# Altium PCB PCI long card 5V - 64 BIT.PCBDOC
Units mil, origin at the board's own origin, x right, y up, seen from the top; angles counter-clockwise.
Board outline 12283 x 4200 mil, 10 copper layers (TopLayer, MidLayer1, MidLayer2, MidLayer3, MidLayer4, MidLayer5, MidLayer6, MidLayer7, MidLayer8, BottomLayer); 1 components, 0 nets, 188 pads, 0 vias.
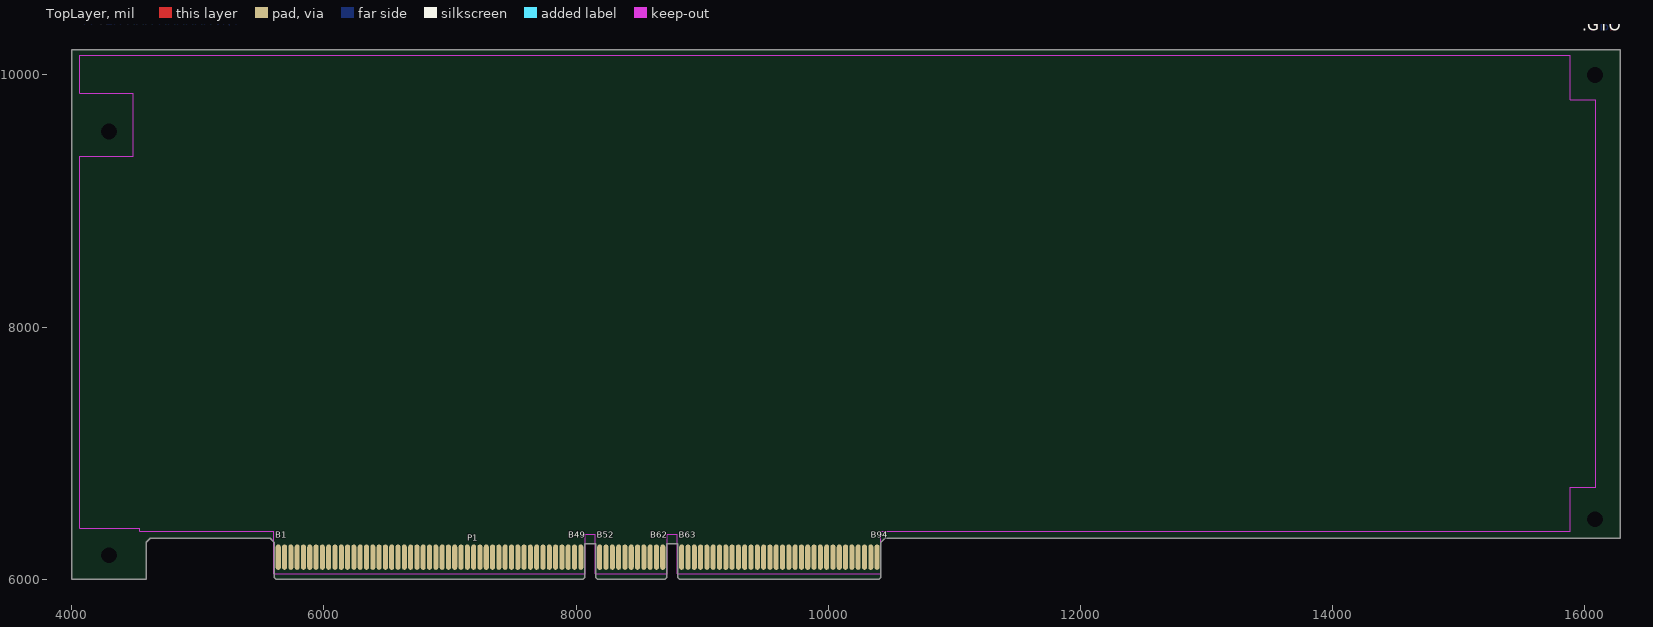
[diagram p0: TopLayer view]
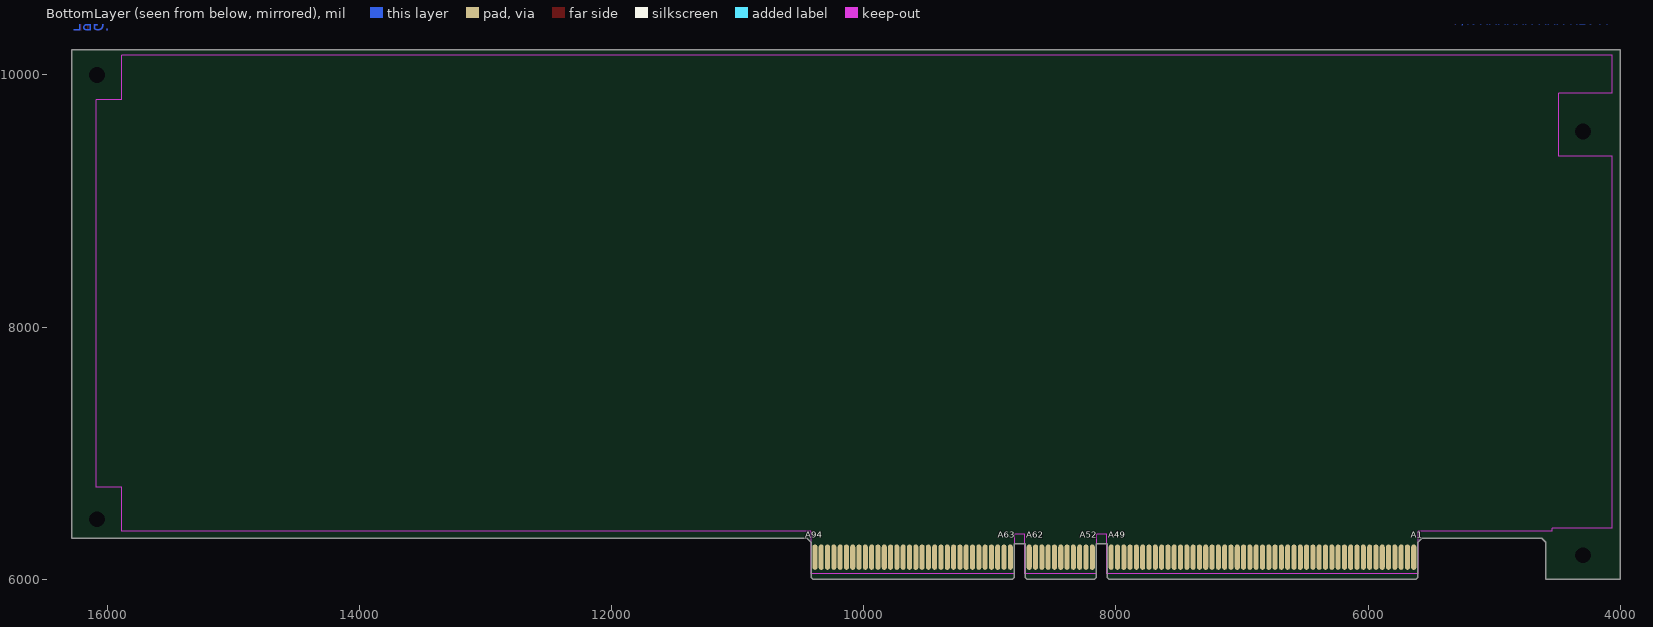
[diagram p1: BottomLayer view, seen from below]
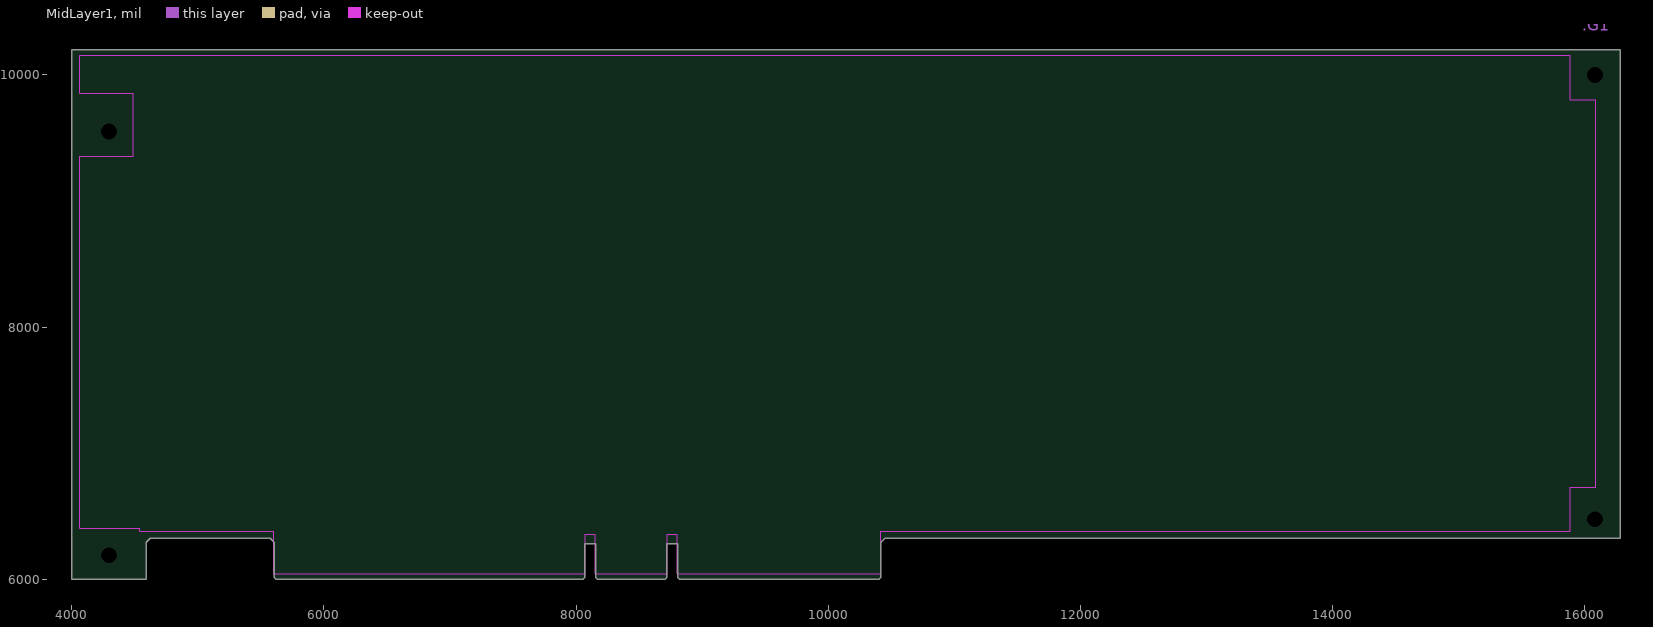
[diagram p2: MidLayer1]
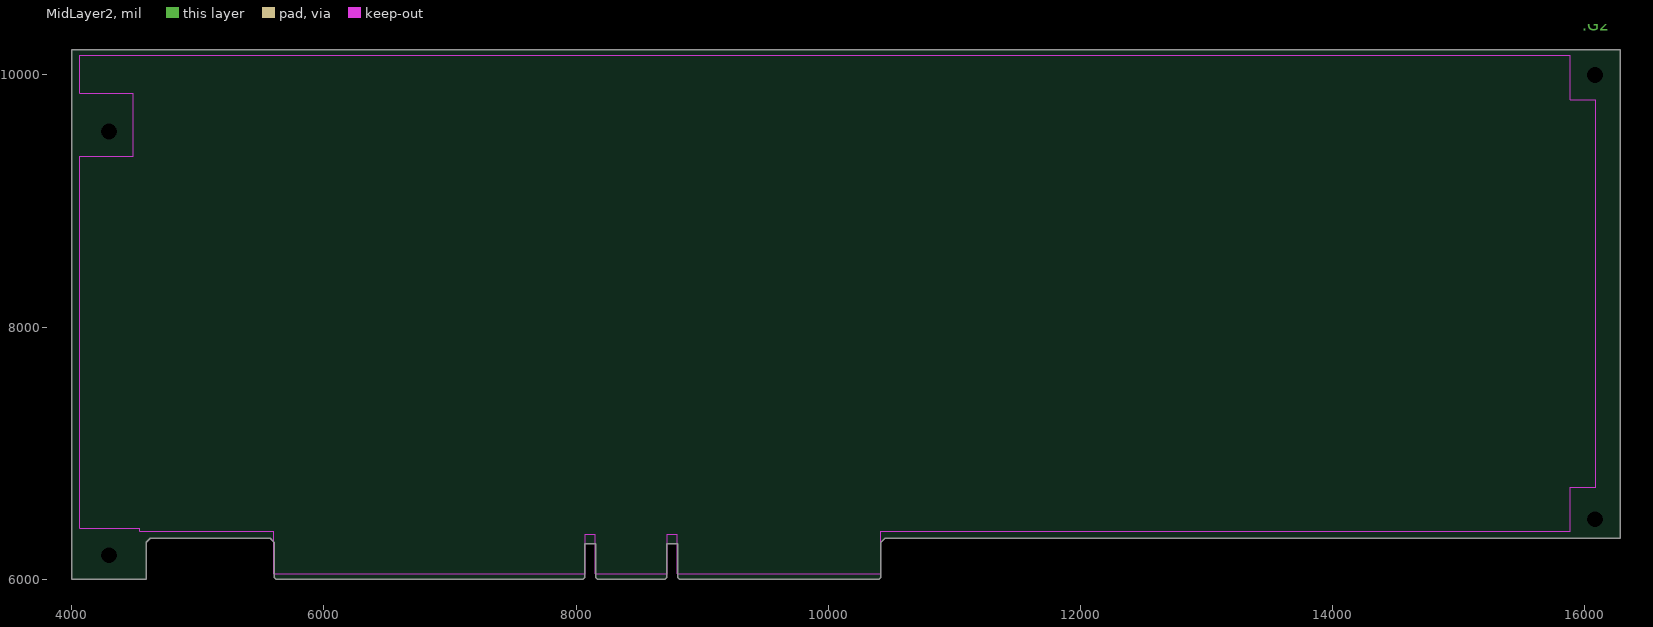
[diagram p3: MidLayer2]
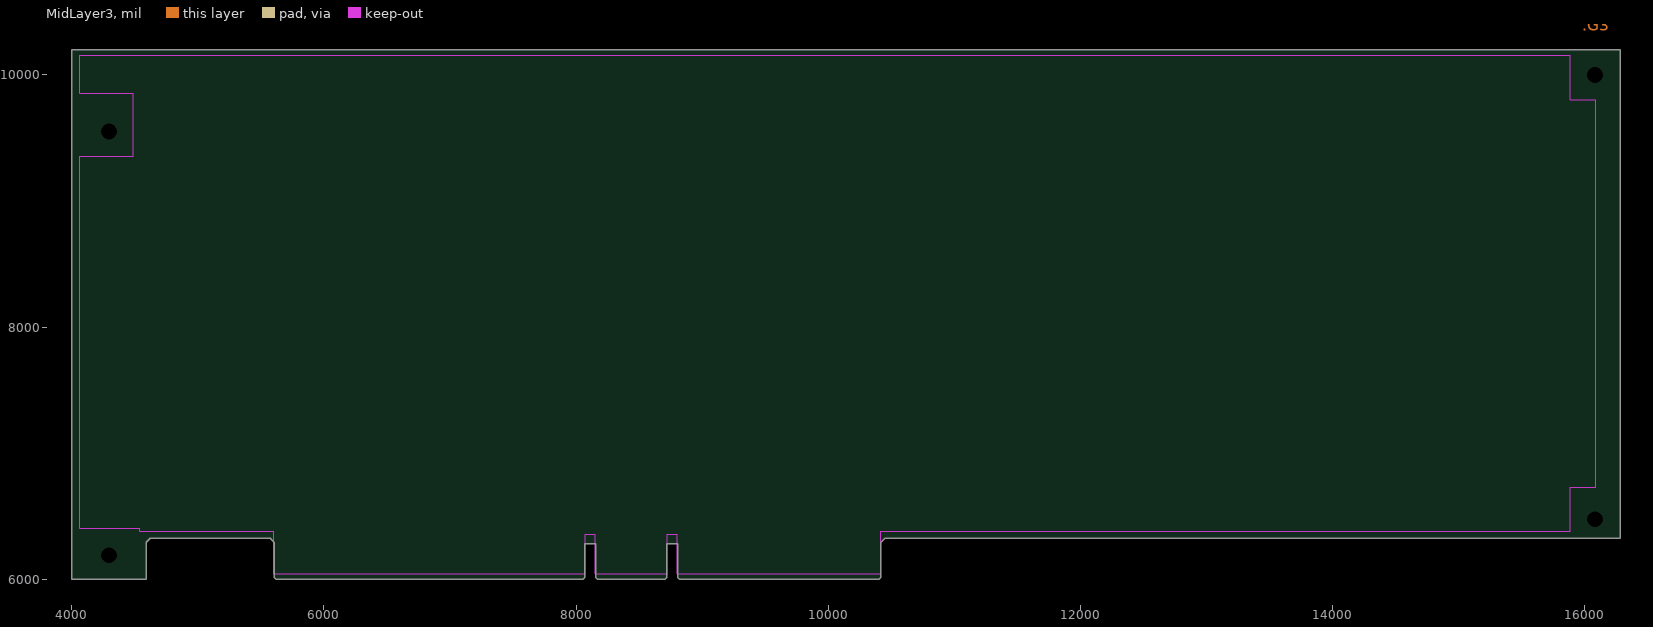
[diagram p4: MidLayer3]
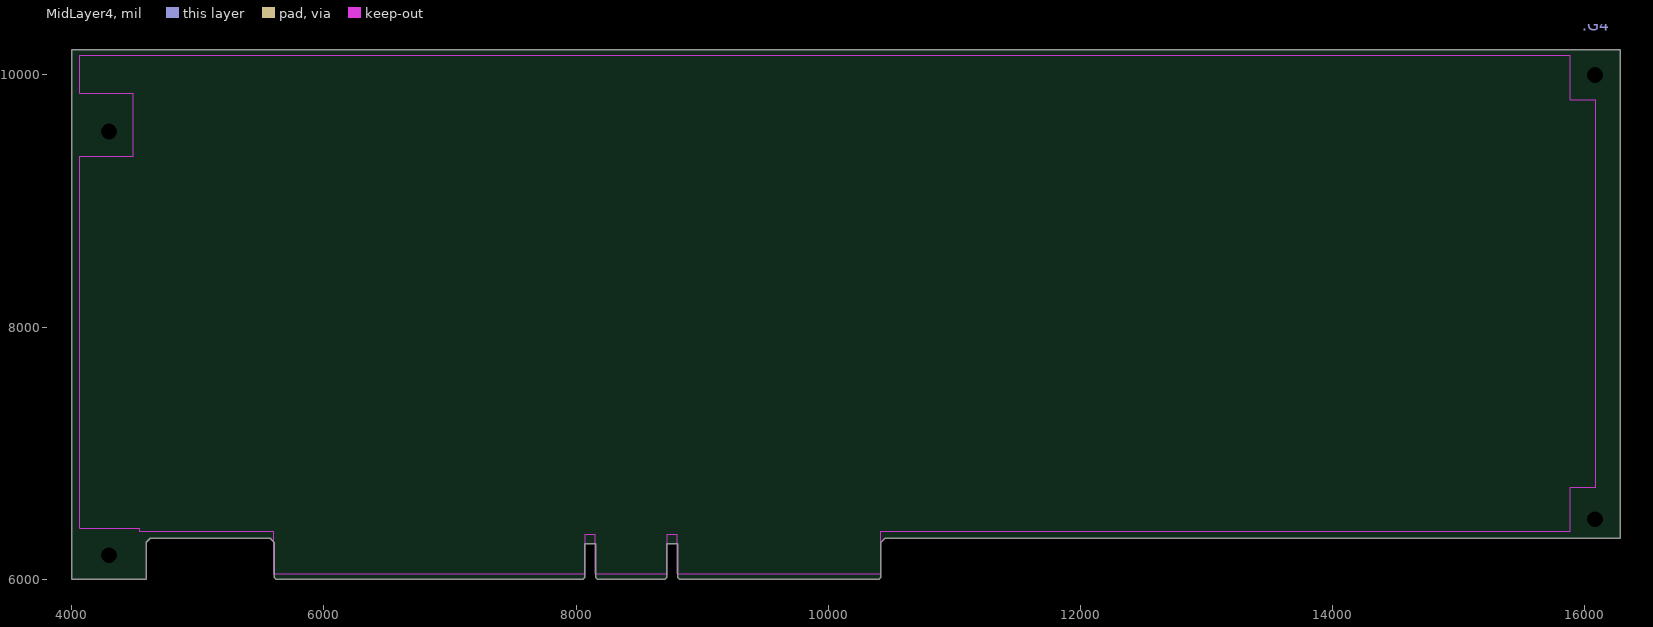
[diagram p5: MidLayer4]
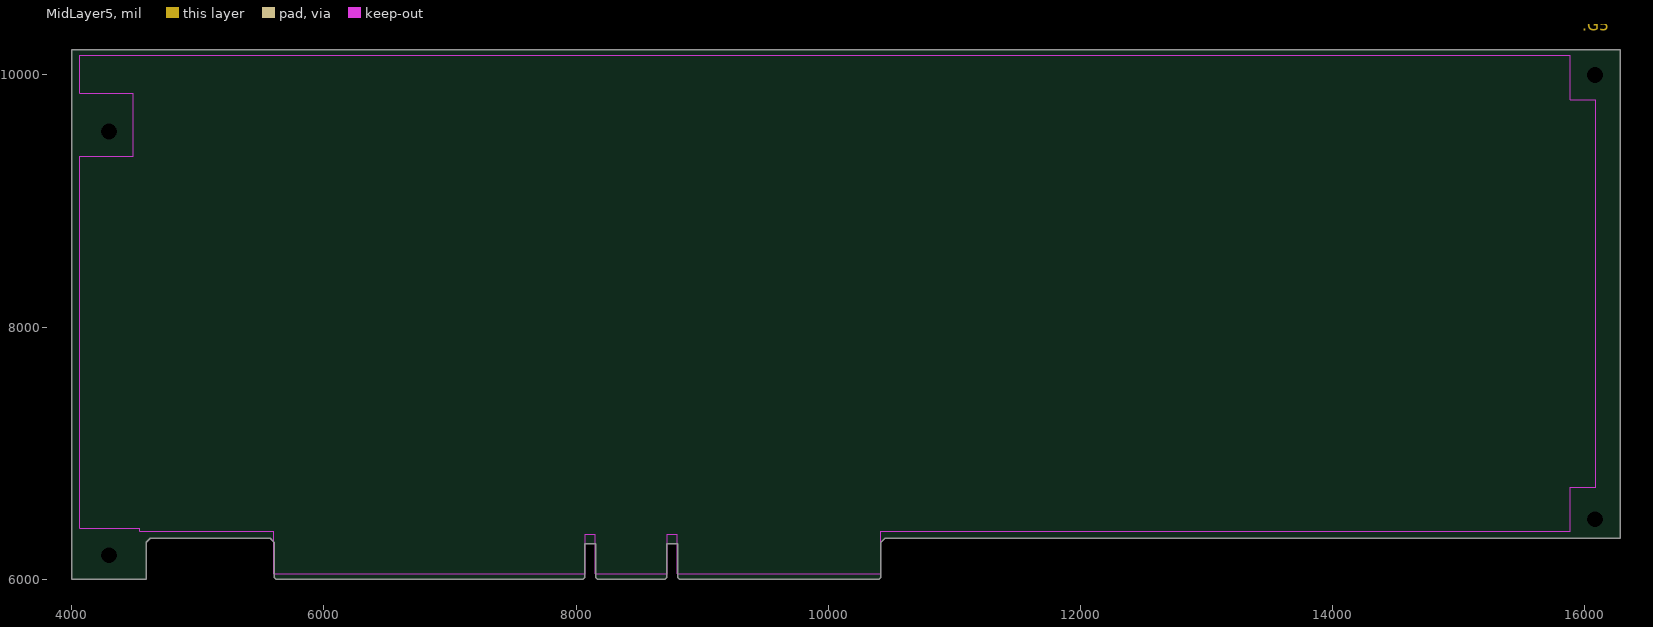
[diagram p6: MidLayer5]
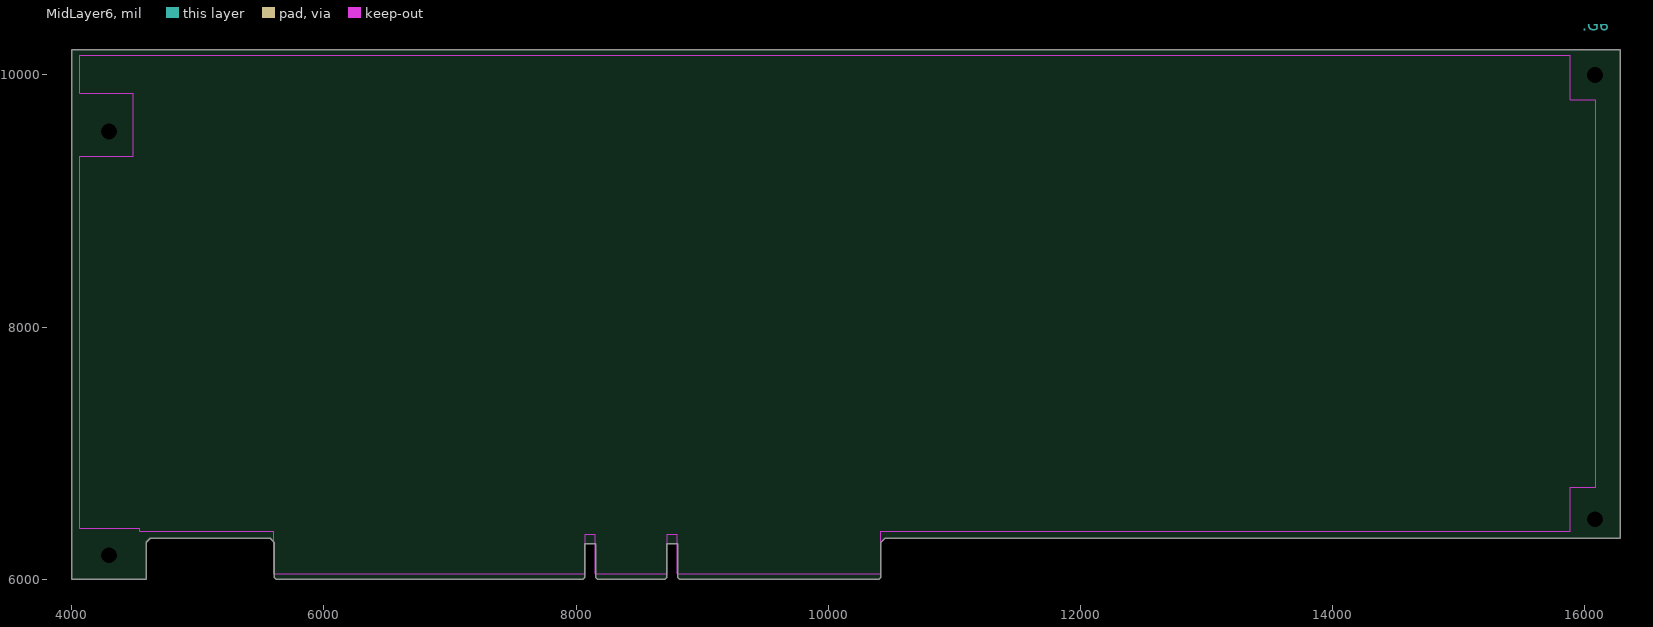
[diagram p7: MidLayer6]
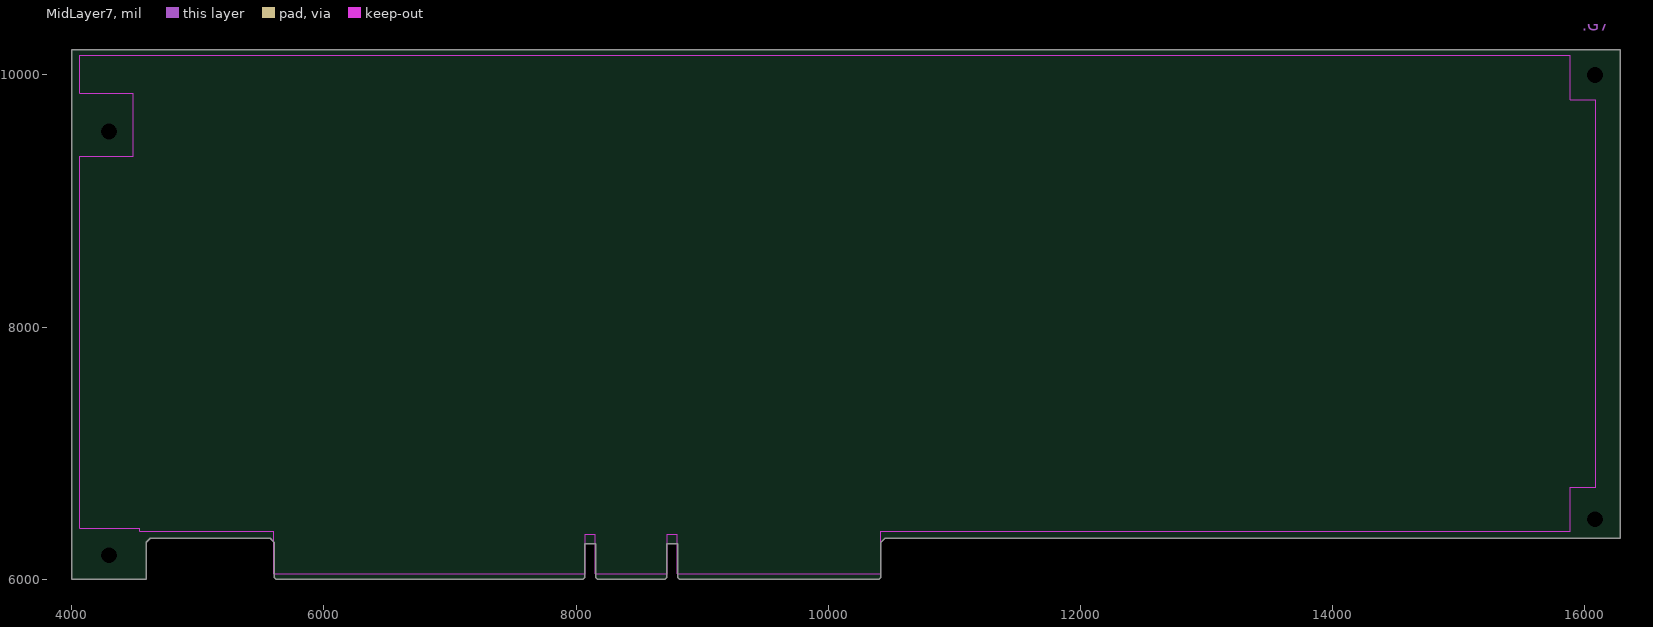
[diagram p8: MidLayer7]
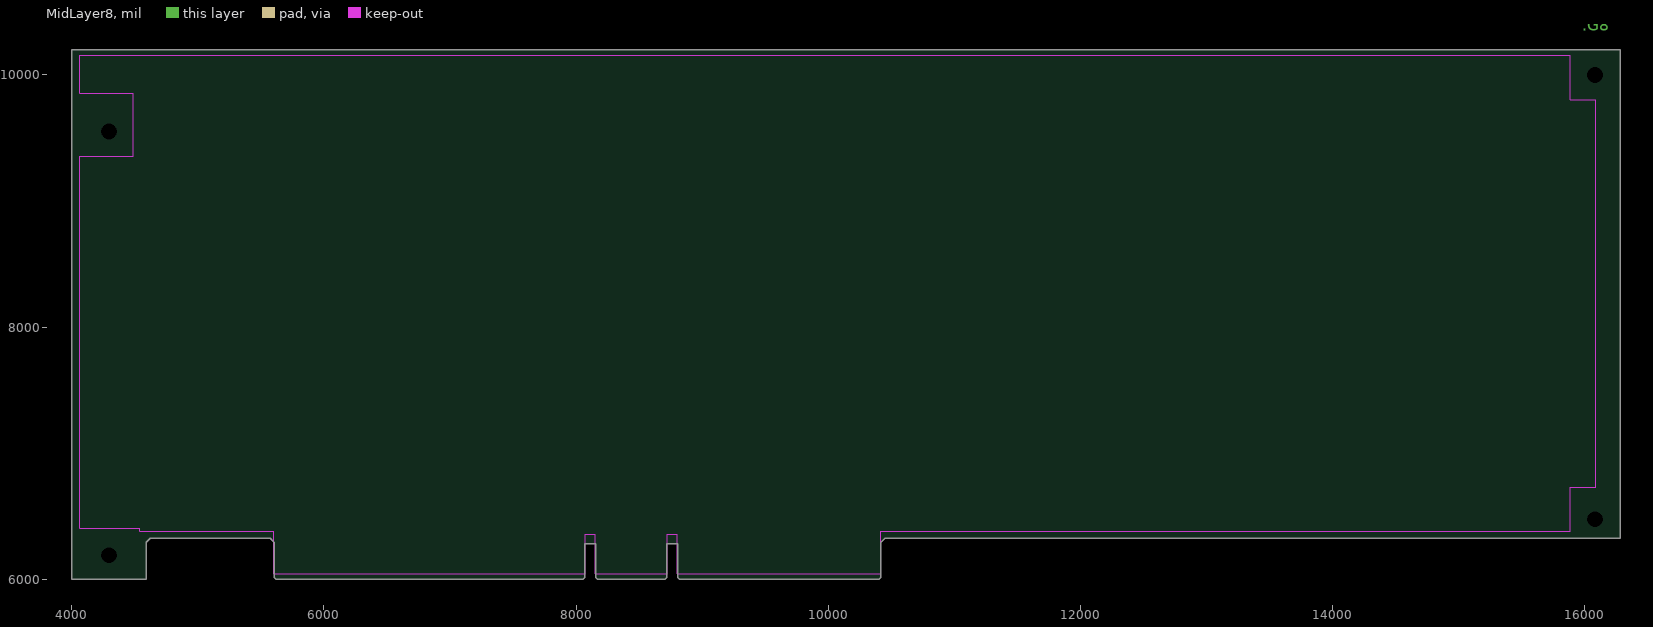
[diagram p9: MidLayer8]

## Layer stack, top to bottom
TopSolder: solder mask 0.4, Solder Resist, Dk 3.5
TopLayer: signal copper 1.4
Dielectric1: core 12.6, FR-4, Dk 4.8
MidLayer1: signal copper 1.4
Dielectric2: prepreg 12.6, FR-4, Dk 4.8
MidLayer2: signal copper 1.4
Dielectric3: core 12.6, FR-4, Dk 4.8
MidLayer3: signal copper 1.4
Dielectric4: prepreg 12.6, FR-4, Dk 4.8
MidLayer4: signal copper 1.4
Dielectric5: core 12.6, FR-4, Dk 4.8
MidLayer5: signal copper 1.4
Dielectric6: prepreg 12.6, FR-4, Dk 4.8
MidLayer6: signal copper 1.4
Dielectric7: core 12.6, FR-4, Dk 4.8
MidLayer7: signal copper 1.4
Dielectric8: prepreg 12.6, FR-4, Dk 4.8
MidLayer8: signal copper 1.4
Dielectric9: core 12.6, FR-4, Dk 4.8
BottomLayer: signal copper 1.4
BottomSolder: solder mask 0.4, Solder Resist, Dk 3.5

## Board outline
4000,6000 4591,6000 4591,6294 4622,6325 5574,6325 5605,6294 5605,6015 5620,6000 8056,6000 8071,6015 8071,6283 8155,6283 8155,6015 8170,6000 8706,6000 8721,6015 8721,6283 8805,6283 8805,6015 8820,6000 10404,6000 10419,6015 10419,6294 10450,6325 16283,6325 16283,10200 4000,10200

## Design rules (kind name [scope] priority, off if disabled: settings)
Clearance [All] p1: gap=10
FabricationTestPointUsage TestPointUsage [All] p1: valid=0 allowmultiple=FALSE
FabricationTestpoint Testpoint [All] p1: side=3 testpointundercomponent=TRUE minsize=40 maxsize=100 preferedsize=60 minholesize=20 maxholesize=40 preferedholesize=32 testpointgrid=1 allowsidetop=TRUE allowsidebottom=TRUE usegrid=TRUE gridtolerance=0.01
PasteMaskExpansion PasteMaskExpansion_1 [InComponent('P1')] p1: expansion=-100
PasteMaskExpansion [All] p2: expansion=0
PlaneClearance [All] p1: clearance=10
PolygonConnect [All] p1: connectstyle=Relief reliefconductorwidth=10 reliefentries=4 polygonreliefangle="90 Angle" airgapwidth=10
RoutingVias [All] p1: holewidth=28 width=50 viastyle="Through Hole" minholewidth=28 minwidth=50 maxholewidth=28 maxwidth=50
SilkToSolderMaskClearance SilkscreenOverComponentPads [IsPad] p1: minsilkscreentomaskgap=10 clearancetoexposedcopper=TRUE
SolderMaskExpansion [All] p1: expansion=2
Width [All] p1: maxlimit=10 minlimit=10 preferedwidth=10
25 further rules are at their usual default settings.

## Components (designator, comment, footprint, x,y, rotation, side; value= is the part's Value field where it differs from the comment)
P1 "PCI5V64BIT" PCI5V64BIT 5638,6175 r0 top locked

## Footprints (in the part's own frame and the unit in brackets; to place one, negate y for a bottom-side part, rotate by r counter-clockwise, add the part's x,y. Pads: shape width x height; smd on the part's side, far side on the other; paste and mask are expansions set on the pad)
PCI5V64BIT [mil]
  oval 40x200 smd far side: A1(0,0) A2(50,0) A3(100,0) A4(150,0) A5(200,0) A6(250,0) A7(300,0) A8(350,0) A9(400,0) A10(450,0) A11(500,0) A12(550,0) A13(600,0) A14(650,0) A15(700,0) A16(750,0) A17(800,0) A18(850,0) A19(900,0) A20(950,0) A21(1000,0) A22(1050,0) A23(1100,0) A24(1150,0) A25(1200,0) A26(1250,0) A27(1300,0) A28(1350,0) A29(1400,0) A30(1450,0) A31(1500,0) A32(1550,0) A33(1600,0) A34(1650,0) A35(1700,0) A36(1750,0) A37(1800,0) A38(1850,0) A39(1900,0) A40(1950,0) A41(2000,0) A42(2050,0) A43(2100,0) A44(2150,0) A45(2200,0) A46(2250,0) A47(2300,0) A48(2350,0) A49(2400,0) A52(2550,0) A53(2600,0) A54(2650,0) A55(2700,0) A56(2750,0) A57(2800,0) A58(2850,0) A59(2900,0) A60(2950,0) A61(3000,0) A62(3050,0) A63(3200,0) A64(3250,0) A65(3300,0) A66(3350,0) A67(3400,0) A68(3450,0) A69(3500,0) A70(3550,0) A71(3600,0) A72(3650,0) A73(3700,0) A74(3750,0) A75(3800,0) A76(3850,0) A77(3900,0) A78(3950,0) A79(4000,0) A80(4050,0) A81(4100,0) A82(4150,0) A83(4200,0) A84(4250,0) A85(4300,0) A86(4350,0) A87(4400,0) A88(4450,0) A89(4500,0) A90(4550,0) A91(4600,0) A92(4650,0) A93(4700,0) A94(4750,0)
  oval 40x200 smd: B1(0,0) B2(50,0) B3(100,0) B4(150,0) B5(200,0) B6(250,0) B7(300,0) B8(350,0) B9(400,0) B10(450,0) B11(500,0) B12(550,0) B13(600,0) B14(650,0) B15(700,0) B16(750,0) B17(800,0) B18(850,0) B19(900,0) B20(950,0) B21(1000,0) B22(1050,0) B23(1100,0) B24(1150,0) B25(1200,0) B26(1250,0) B27(1300,0) B28(1350,0) B29(1400,0) B30(1450,0) B31(1500,0) B32(1550,0) B33(1600,0) B34(1650,0) B35(1700,0) B36(1750,0) B37(1800,0) B38(1850,0) B39(1900,0) B40(1950,0) B41(2000,0) B42(2050,0) B43(2100,0) B44(2150,0) B45(2200,0) B46(2250,0) B47(2300,0) B48(2350,0) B49(2400,0) B52(2550,0) B53(2600,0) B54(2650,0) B55(2700,0) B56(2750,0) B57(2800,0) B58(2850,0) B59(2900,0) B60(2950,0) B61(3000,0) B62(3050,0) B63(3200,0) B64(3250,0) B65(3300,0) B66(3350,0) B67(3400,0) B68(3450,0) B69(3500,0) B70(3550,0) B71(3600,0) B72(3650,0) B73(3700,0) B74(3750,0) B75(3800,0) B76(3850,0) B77(3900,0) B78(3950,0) B79(4000,0) B80(4050,0) B81(4100,0) B82(4150,0) B83(4200,0) B84(4250,0) B85(4300,0) B86(4350,0) B87(4400,0) B88(4450,0) B89(4500,0) B90(4550,0) B91(4600,0) B92(4650,0) B93(4700,0) B94(4750,0)

## Free pads (board coordinates)
  round 50 hole 125: 1(16083,6475) 2(16083,10000) 3(4295,9552) 4(4295,6190)

## Nets (pads, with @x,y where several pads share a name; then routed paths per layer and width w, separated by ;. In a path a pad name is that pad's centre, name@x,y a point inside that pad or via, vN(x,y) a via of type N, cw(c..) or ccw(c..) an arc to the next point about the centre after c; other vN are vias at no path point)
pads on no net: P1.A1 P1.A2 P1.A3 P1.A4 P1.A5 P1.A6 P1.A7 P1.A8 P1.A9 P1.A10 P1.A11 P1.A12 P1.A13 P1.A14 P1.A15 P1.A16 P1.A17 P1.A18 P1.A19 P1.A20 P1.A21 P1.A22 P1.A23 P1.A24 P1.A25 P1.A26 P1.A27 P1.A28 P1.A29 P1.A30 P1.A31 P1.A32 P1.A33 P1.A34 P1.A35 P1.A36 P1.A37 P1.A38 P1.A39 P1.A40 P1.A41 P1.A42 P1.A43 P1.A44 P1.A45 P1.A46 P1.A47 P1.A48 P1.A49 P1.A52 P1.A53 P1.A54 P1.A55 P1.A56 P1.A57 P1.A58 P1.A59 P1.A60 P1.A61 P1.A62 P1.A63 P1.A64 P1.A65 P1.A66 P1.A67 P1.A68 P1.A69 P1.A70 P1.A71 P1.A72 P1.A73 P1.A74 P1.A75 P1.A76 P1.A77 P1.A78 P1.A79 P1.A80 P1.A81 P1.A82 P1.A83 P1.A84 P1.A85 P1.A86 P1.A87 P1.A88 P1.A89 P1.A90 P1.A91 P1.A92 P1.A93 P1.A94 P1.B1 P1.B2 P1.B3 P1.B4 P1.B5 P1.B6 P1.B7 P1.B8 P1.B9 P1.B10 P1.B11 P1.B12 P1.B13 P1.B14 P1.B15 P1.B16 P1.B17 P1.B18 P1.B19 P1.B20 P1.B21 P1.B22 P1.B23 P1.B24 P1.B25 P1.B26 P1.B27 P1.B28 P1.B29 P1.B30 P1.B31 P1.B32 P1.B33 P1.B34 P1.B35 P1.B36 P1.B37 P1.B38 P1.B39 P1.B40 P1.B41 P1.B42 P1.B43 P1.B44 P1.B45 P1.B46 P1.B47 P1.B48 P1.B49 P1.B52 P1.B53 P1.B54 P1.B55 P1.B56 P1.B57 P1.B58 P1.B59 P1.B60 P1.B61 P1.B62 P1.B63 P1.B64 P1.B65 P1.B66 P1.B67 P1.B68 P1.B69 P1.B70 P1.B71 P1.B72 P1.B73 P1.B74 P1.B75 P1.B76 P1.B77 P1.B78 P1.B79 P1.B80 P1.B81 P1.B82 P1.B83 P1.B84 P1.B85 P1.B86 P1.B87 P1.B88 P1.B89 P1.B90 P1.B91 P1.B92 P1.B93 P1.B94

## Keep-outs
KeepOutLayer:
  lines w8: 4063,6405 4538,6405 4538,6380 5603,6380 5603,6045 8073,6045 8073,6355 8153,6355 8153,6045 8723,6045 8723,6355 8803,6355 8803,6045 10418,6045 10418,6380 15888,6380 15888,6730 16088,6730 16088,9805 15888,9805 15888,10155 4063,10155 4063,9855 4488,9855 4488,9355 4063,9355 4063,6405

## Other copper
TopLayer:
  text ".GTL" at 15983,10350 h90
MidLayer1:
  text ".G1" at 15983,10350 h90
MidLayer2:
  text ".G2" at 15983,10350 h90
MidLayer3:
  text ".G3" at 15983,10350 h90
MidLayer4:
  text ".G4" at 15983,10350 h90
MidLayer5:
  text ".G5" at 15983,10350 h90
MidLayer6:
  text ".G6" at 15983,10350 h90
MidLayer7:
  text ".G7" at 15983,10350 h90
MidLayer8:
  text ".G8" at 15983,10350 h90
BottomLayer:
  text "P/N XXXXXX-XXX REV A" at 5320,10400 h75
  text ".GBL" at 15983,10350 h90

## Silkscreen, mask and mechanical layers (free items; w line width, h text height)
TopOverlay:
  rectangle: 4281,10893 5031,11093
  rectangle: 4281,10603 5031,10803
  lines w10: 5392.59,10995.97 ccw(c5441,11035.5) 5392.71,10995.83
  text "C" at 5496,10998 h60
  text "2002 COMPANY NAME" at 5646,10998 h75
  text "S/N" at 4031,10950.5 h75
  text "BOARD NAME" at 5496,10823 h75
  text "ASSY NO.: XXXXXX" at 5496,10673 h75
  text "REV" at 4031,10653 h75
  text ".GTO" at 15983,10350 h90
TopPaste:
  text ".GTP" at 15983,10350 h90
BottomPaste:
  text ".GBP" at 15983,10350 h90
TopSolder:
  rectangle: 5583,5980 10438,6280
  text ".GTS" at 15983,10350 h90
BottomSolder:
  rectangle: 5583,5980 10438,6280
  text ".GBS" at 15983,10350 h90
Mechanical1:
  the board outline again, w20
Mechanical4:
  circle w10: c5578.67,6044.32 r100
  lines w8: 16918,7330 17093,7330 17093,7035 ; 17018,6830 17418,6830 ; 17018,7030 17368,7030 ; 17093,6530 17093,6825 ; 17180.5,6505 17475.5,6505 ; 17255.5,8055 17563,8055 ; 17480.5,6430 17480.5,6780 ; 17505.5,6430 17505.5,6780 ; 17568,7830 17568,8130 ; 17593,7080 17868,8080 ; 17805.5,6505 17510.5,6505 ; 18137.72,7900.07 17848.77,8005.24 ; 17093,6825 17118,6675 17068,6675 17093,6825 ; 17093,7035 17118,7185 17068,7185 17093,7035 ; 17475.5,6505 17325.5,6530 17325.5,6480 17475.5,6505 ; 17510.5,6505 17660.5,6480 17660.5,6530 17510.5,6505 ; 17563,8055 17413,8080 17413,8030 17563,8055 ; 17848.77,8005.24 17998.27,7977.43 17981.17,7930.45 17848.77,8005.24 ; 17073,6680 17113,6680 17093,6815 17073,6680 ; 17073,7180 17113,7180 17093,7045 17073,7180 ; 17078,6685 17108,6685 17093,6805 17078,6685 ; 17078,7175 17108,7175 17093,7055 17078,7175 ; 17083,6690 17103,6690 17093,6795 17083,6690 ; 17083,7170 17103,7170 17093,7065 17083,7170 ; 17088,6695 17093,6785 17098,6695 17088,6695 ; 17088,7165 17098,7165 17093,7075 17088,7165 ; 17330.5,6485 17330.5,6525 17465.5,6505 17330.5,6485 ; 17335.5,6490 17335.5,6520 17455.5,6505 17335.5,6490 ; 17340.5,6495 17340.5,6515 17445.5,6505 17340.5,6495 ; 17345.5,6500 17345.5,6510 17435.5,6505 17345.5,6500 ; 17418,7030 17480.5,6830 17505.5,6830 17568,7030 17568,7792.5 17530.5,7792.5 17530.5,7880 17468,7730 17455.5,7792.5 17418,7792.5 17418,7030 ; 17418,8035 17553,8055 17418,8075 17418,8035 ; 17423,8040 17543,8055 17423,8070 17423,8040 ; 17428,8045 17533,8055 17428,8065 17428,8045 ; 17433,8050 17433,8060 17523,8055 17433,8050 ; 17520.5,6505 17655.5,6485 17655.5,6525 17520.5,6505 ; 17530.5,6505 17650.5,6520 17650.5,6490 17530.5,6505 ; 17540.5,6505 17645.5,6515 17645.5,6495 17540.5,6505 ; 17550.5,6505 17640.5,6510 17640.5,6500 17550.5,6505 ; 17858.16,8001.82 17991.86,7974.45 17978.18,7936.86 17858.16,8001.82 ; 17867.56,7998.4 17985.45,7971.46 17975.19,7943.27 17867.56,7998.4 ; 17876.96,7994.98 17979.05,7968.47 17972.21,7949.67 17876.96,7994.98 ; 17886.36,7991.56 17972.64,7965.48 17969.22,7956.08 17886.36,7991.56
  lines w10: 5436.67,5991.32 5436.67,6046.32 5456.67,5996.32 5436.67,5991.32 ; 5436.87,6046.16 5438,6100 5458.36,6096.79 5436.87,6046.16
  text ".Pcb_File_Name_No_Path" at 14083,10540 h90
  text ".Printout_Name" at 14083,10350 h90
  text "DETAIL A" at 17118,8330 h150
  text "o" at 17793,8092.5 h48
  text "20" at 17630.5,7992.5 h90
  text "0.071" at 16555.5,7280 h90
  text "+.010" at 16568,7130 h75
  text "-.015" at 16568,6980 h75
  text "0.010" at 17868,6455 h90
  text "+.005" at 17868,6305 h75
  text "-.010" at 17868,6155 h75
  text "SEE DETAIL A" at 4690,6000 h75
DrillDrawing:
  text ".LEGEND" at 16583,9125 h90
  text "Drilling Details." at 16583,8975 h90

## Dimensions
3980,6180 to 4000,6000 on Mechanical4
4295,5980 to 4000,6000 on Mechanical4

## Text inside footprints (layer, text, board x,y; h text height)
P1: TopOverlay "B52" at 8163,6330 h48; TopOverlay "B63" at 8813,6330 h48; TopOverlay "B94" at 10338,6330 h48; TopOverlay "B62" at 8588,6330 h48; TopOverlay "B49" at 7938,6330 h48; TopOverlay "B1" at 5613,6330 h48; BottomOverlay "A62" at 8713,6330 h48; BottomOverlay "A49" at 8063,6330 h48; BottomOverlay "A52" at 8288,6330 h48; BottomOverlay "A63" at 8938,6330 h48; BottomOverlay "A94" at 10463,6330 h48; BottomOverlay "A1" at 5663,6330 h48